# Altium PCB 高达会车驱动.PcbDoc
Units mil, origin at the board's own origin, x right, y up, seen from the top; angles counter-clockwise.
Board outline 3149.61 x 2559.06 mil, 2 copper layers (Top Layer, Bottom Layer); 70 components, 50 nets, 207 pads, 87 vias.
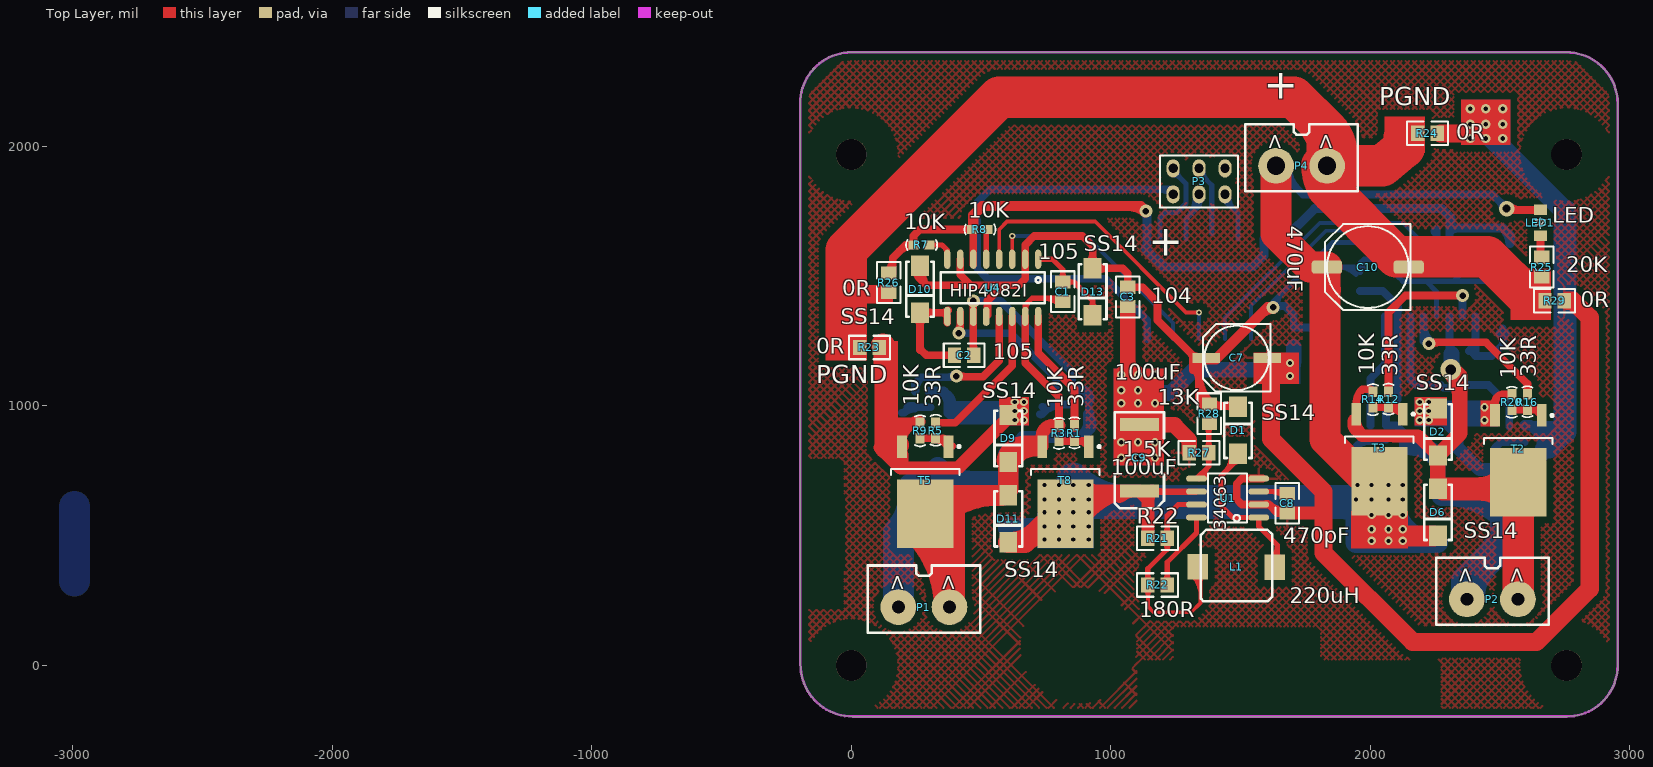
[diagram p0: Top Layer view]
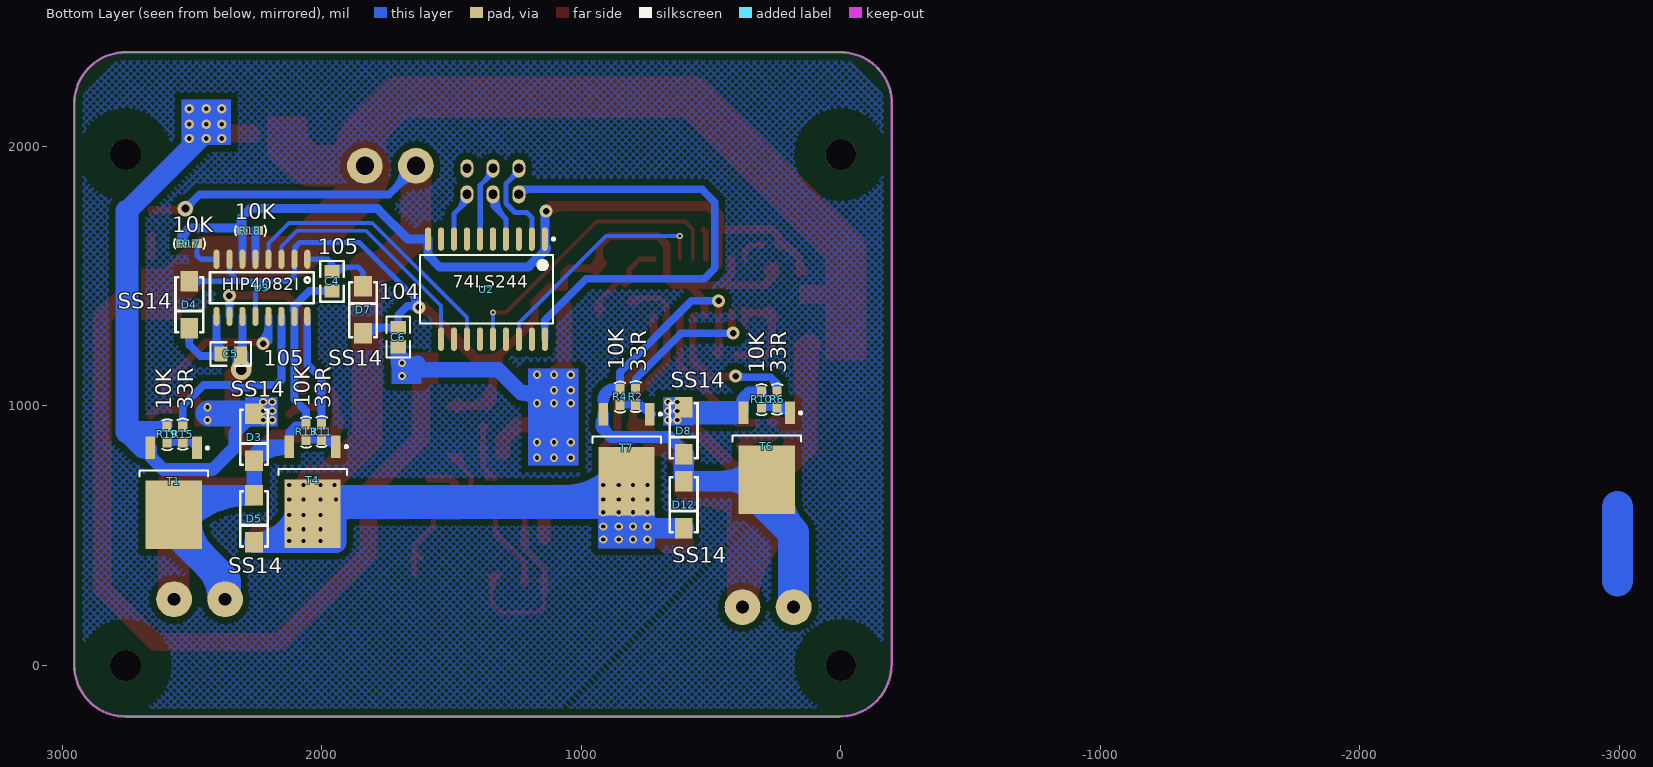
[diagram p1: Bottom Layer view, seen from below]
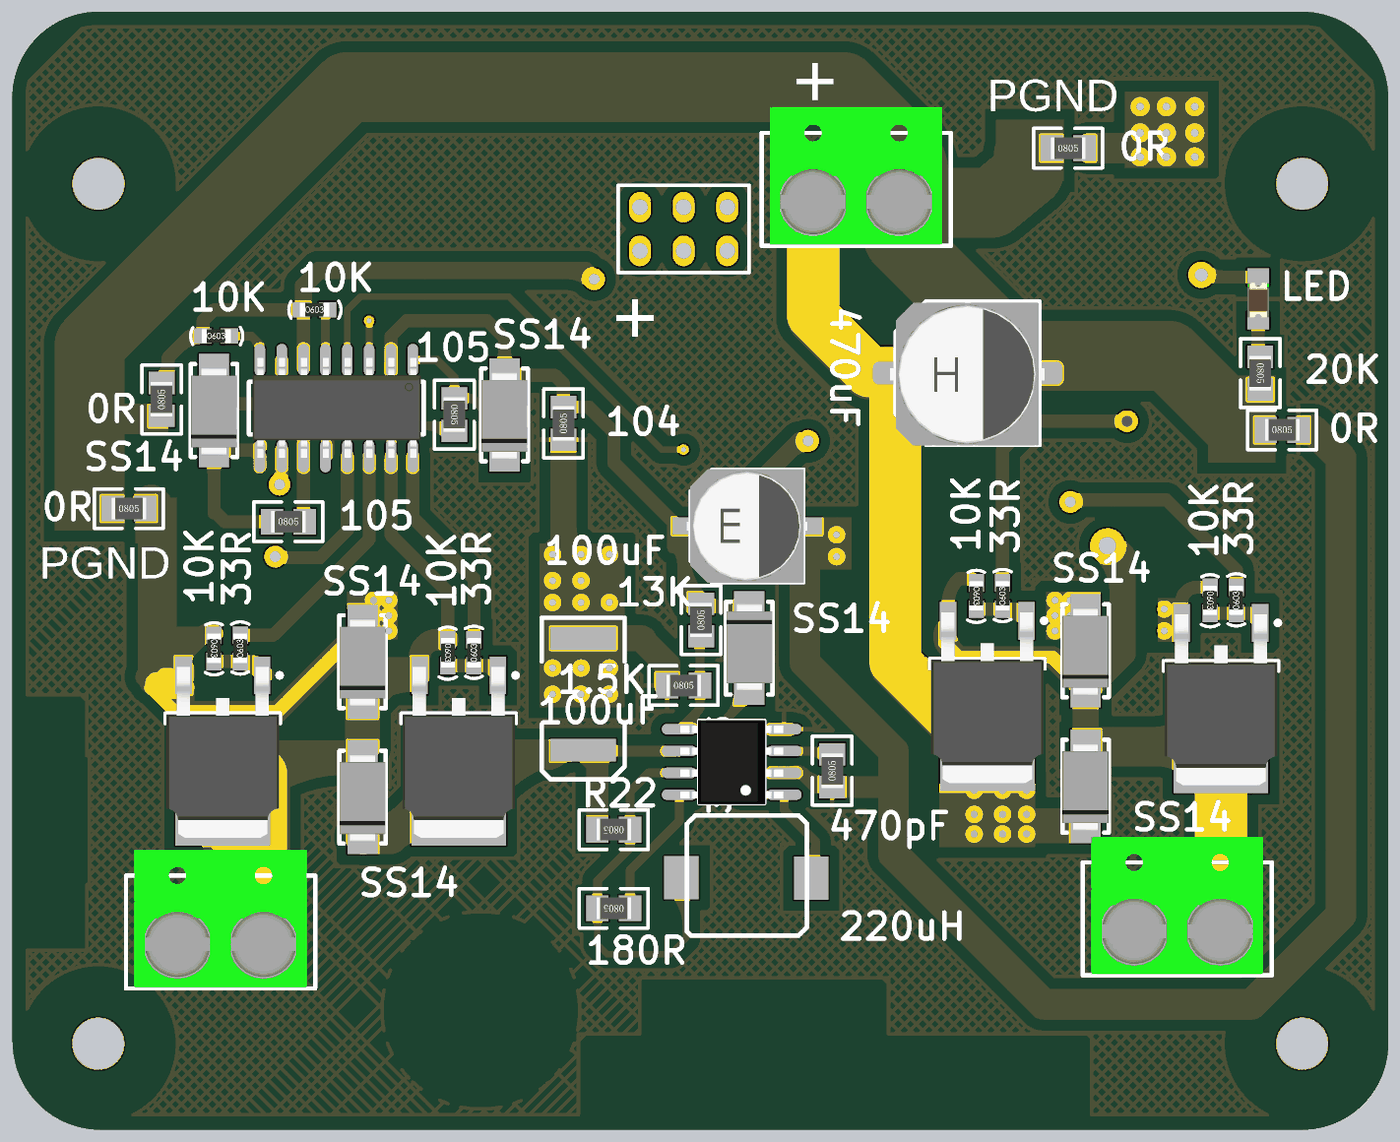
[diagram p2: 3D render of the assembled board from above, using the file's embedded part models]
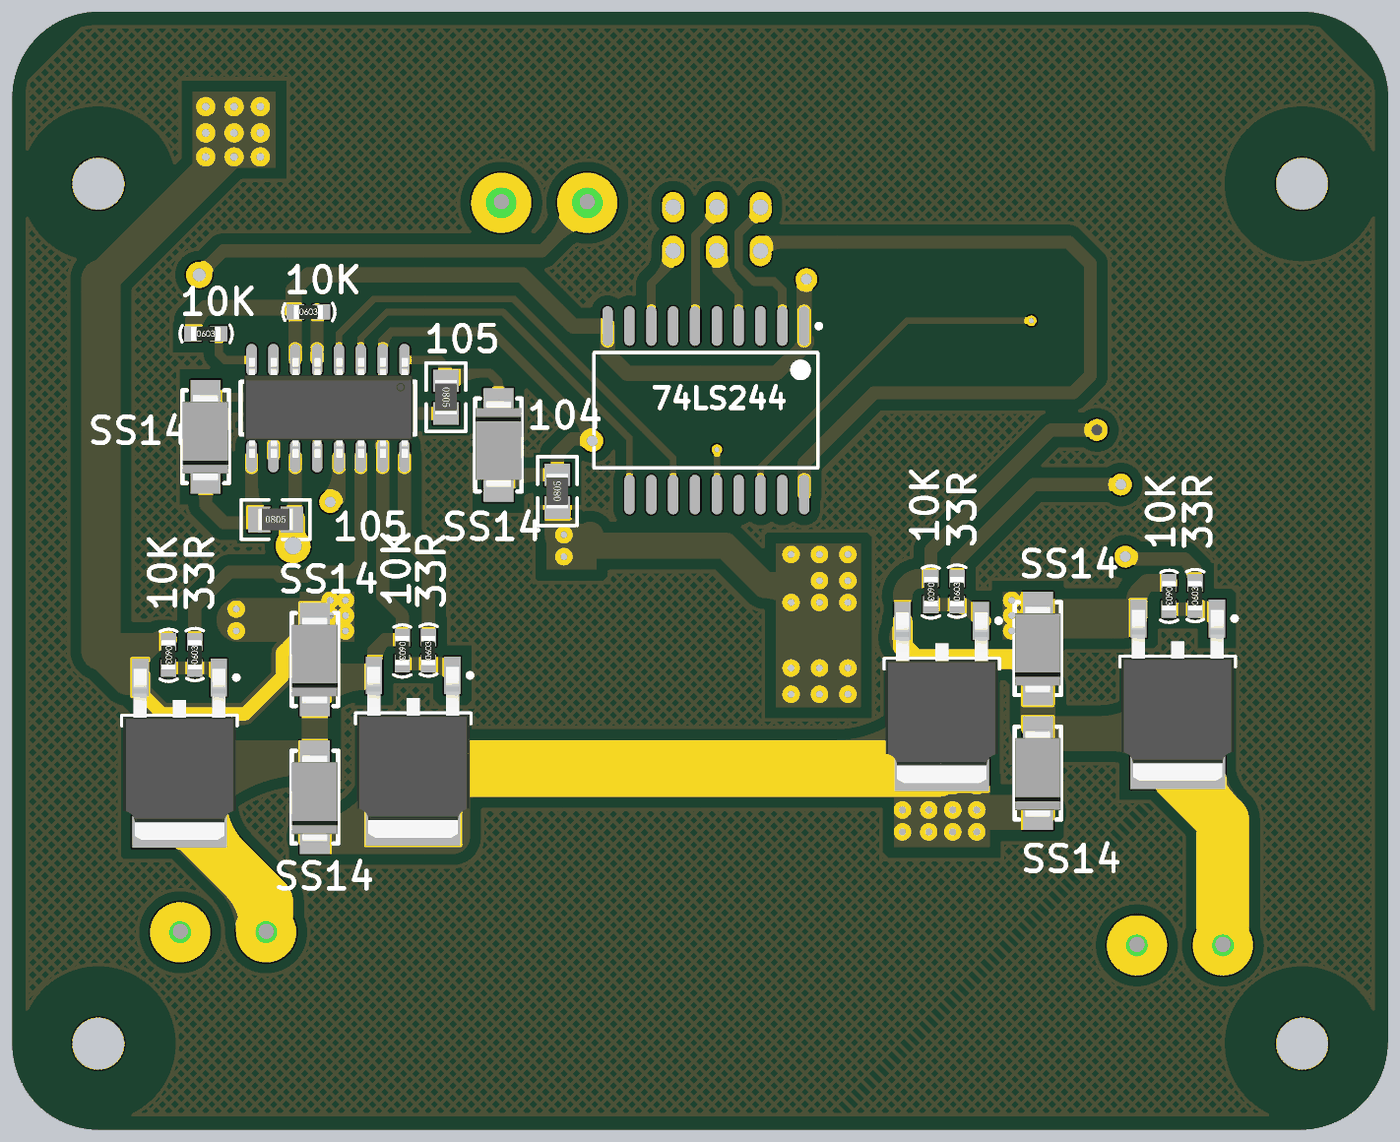
[diagram p3: 3D render of the assembled board from below, using the file's embedded part models]

## Layer stack, top to bottom
Top Solder: solder mask 0.4, Solder Resist, Dk 3.5
Top Layer: signal copper 1.4
Dielectric1: dielectric 12.6, FR-4, Dk 4.8
Bottom Layer: signal copper 1.4
Bottom Solder: solder mask 0.4, Solder Resist, Dk 3.5

## Board outline
5,-196.85 cw(c5,4.07) -195.92,4.07 -196.85,4.07 -196.85,2165.35 cw(c0,2165.35) 0,2362.2 2755.91,2362.2 cw(c2755.91,2165.35) 2952.76,2165.35 2952.76,0 cw(c2755.91,0) 2755.91,-196.85

## Design rules (kind name [scope] priority, off if disabled: settings)
Clearance hold [HasPad('free-1') or HasPad('free-2')  or HasPad('free-3') oR HasPad('free-4') vs inpolygon] p1: gap=118.11
Clearance inpolygon [inpolygon] p2: gap=25
Clearance main_road_clearance [InNetClass('POWER_OR_GND')] p3: gap=15
Clearance [All] p4: gap=10
PolygonConnect PGND2 [InNet('PGND2')] p1: connectstyle=Direct reliefconductorwidth=10 reliefentries=4 polygonreliefangle="90 Angle" airgapwidth=10
PolygonConnect PGND1 [InNet('PGND1')] p2: connectstyle=Direct reliefconductorwidth=10 reliefentries=4 polygonreliefangle="90 Angle" airgapwidth=10
PolygonConnect [All] p3: connectstyle=Relief reliefconductorwidth=10 reliefentries=4 polygonreliefangle="90 Angle" airgapwidth=10
RoutingVias [All] p1: holewidth=28 width=50 viastyle="Through Hole" minholewidth=16 minwidth=32 maxholewidth=50 maxwidth=90
SilkToSolderMaskClearance SilkscreenOverComponentPads [IsPad] p1: minsilkscreentomaskgap=10 clearancetoexposedcopper=TRUE
SolderMaskExpansion [All] p1: expansion=4
Width main_road_width [InNetClass('POWER_OR_GND')] p1: maxlimit=170 minlimit=20 preferedwidth=80
Width [All] p2: maxlimit=30 minlimit=10 preferedwidth=15
29 further rules are at their usual default settings.

## Classes and differential pairs
net class POWER_OR_GND: 5V 7.2V 12V AGND DGND GND M1 M2 M3 M4 PGND1 PGND2

## Components (designator, comment, footprint, x,y, rotation, side; value= is the part's Value field where it differs from the comment)
C1 "105" 0805 815,1440 r270 top
C2 "105" 0805 435,1195 r0 top
C3 "104" 0805 1065,1420 r90 top
C4 "105" 0805 1960,1480 r270 bottom
C5 "105" 0805 2350,1200 r180 bottom
C6 "104" 0805 1705,1265 r90 bottom
C7 "100uF" ED6.3 1485,1185 r0 top
C8 "470pF" 0805 1680,625 r90 top
C9 "100uF" "Pol Cap(220uF)" 1110,800 r90 top
C10 "470uF" ED8 1990,1535 r0 top
D1 "SS14" 二极管 1490,910 r90 top
D2 "SS14" 二极管 2260,895 r270 top
D3 "SS14" 二极管 2260,875 r270 bottom
D4 "SS14" 二极管 2510,1385 r270 bottom
D5 "SS14" 二极管 2260,560 r270 bottom
D6 "SS14" 二极管 2260,585 r270 top
D7 "SS14" 二极管 1840,1375 r90 bottom
D8 "SS14" 二极管 605,900 r270 bottom
D9 "SS14" 二极管 605,870 r270 top
D10 "SS14" 二极管 265,1445 r270 top
D11 "SS14" 二极管 605,560 r270 top
D12 "SS14" 二极管 605,615 r270 bottom
D13 "SS14" 二极管 930,1435 r270 top
L1 "220uH" 电感（220uh） 1485,385 r0 top
LED1 "LED" LED(0805) 2655,1705 r270 top
P1 "*" 接线端子#1 280,225 r180 top
P2 "*" 接线端子#1 2470,255 r180 top
P3 "Header 3X2" HDR2X3 1240,1815 r0 top
P4 "*" 接线端子#2 1735,1925 r180 top
R1 "33R" 0603 860,895 r90 top
R2 "33R" 0603 790,1035 r90 bottom
R3 "10K" 0603 800,895 r270 top
R4 "10K" 0603 850,1035 r270 bottom
R5 "33R" 0603 325,905 r90 top
R6 "33R" 0603 245,1025 r90 bottom
R7 "10K" 0603 270,1620 r0 top
R8 "10K" 0603 495,1680 r0 top
R9 "10K" 0603 265,905 r270 top
R10 "10K" 0603 305,1025 r270 bottom
R11 "33R" 0603 2000,900 r90 bottom
R12 "33R" 0603 2070,1025 r90 top
R13 "10K" 0603 2060,900 r270 bottom
R14 "10K" 0603 2010,1025 r270 top
R15 "33R" 0603 2535,890 r90 bottom
R16 "33R" 0603 2605,1015 r90 top
R17 "10K" 0603 2510,1625 r180 bottom
R18 "10K" 0603 2275,1675 r180 bottom
R19 "10K" 0603 2595,890 r270 bottom
R20 "10K" 0603 2545,1015 r270 top
R21 "R22" 0805 1180,490 r180 top
R22 "180R" 0805 1180,310 r180 top
R23 "0R" 0805 70,1225 r0 top
R24 "0R" 0805 2220,2050 r0 top
R25 "20K" 0805 2660,1535 r270 top
R26 "0R" 0805 145,1475 r90 top
R27 "1.5K" 0805 1340,820 r0 top
R28 "13K" 0805 1380,970 r90 top
R29 "0R" 0805 2710,1405 r0 top
T1 "IRLR7843" IRLR7843(MOS) 2550,620 r270 bottom
T2 "IRLR7843" IRLR7843(MOS) 2590,745 r270 top
T3 "IRLR7843" IRLR7843(MOS) 2055,750 r270 top
T4 "IRLR7843" IRLR7843(MOS) 2015,625 r270 bottom
T5 "IRLR7843" IRLR7843(MOS) 305,625 r270 top
T6 "IRLR7843" IRLR7843(MOS) 265,755 r270 bottom
T7 "IRLR7843" IRLR7843(MOS) 805,750 r270 bottom
T8 "IRLR7843" IRLR7843(MOS) 845,625 r270 top
U1 "34063" MA34063 1445,640 r180 top
U2 "74LS244" 74LS244D 1365,1450 r270 bottom
U3 "HIP4082I" HIP4082I 2215,1455 r270 bottom
U4 "HIP4082I" HIP4082I 560,1455 r270 top

## Footprints (in the part's own frame and the unit in brackets; to place one, negate y for a bottom-side part, rotate by r counter-clockwise, add the part's x,y. Pads: shape width x height; smd on the part's side, far side on the other; paste and mask are expansions set on the pad)
74LS244D [mm]
  oval 2.3x0.6 smd: 1(-4.9,5.715) 2(-4.9,4.445) 3(-4.9,3.175) 4(-4.9,1.905) 5(-4.9,0.635) 6(-4.9,-0.635) 7(-4.9,-1.905) 8(-4.9,-3.175) 9(-4.9,-4.445) 10(-4.9,-5.715) 12(4.9,-4.445) 13(4.9,-3.175) 14(4.9,-1.905) 15(4.9,-0.635) 16(4.9,0.635) 17(4.9,1.905) 18(4.9,3.175) 19(4.9,4.445) 20(4.9,5.715)
  silkscreen extent -5.02,-6.5 3.35,6.69, body extent -3.8,-6.5 3.8,6.5, height 2.65
0603 [mil]
  rect 40x35 smd: 1(-30,0) 2(30,0)
  silkscreen extent -59,-20 61,20, body extent -33,-16 33,16, height 22
0805 [mm]
  rect 1.3x1.5 smd: 1(-0.95,0) 2(0.95,0)
  silkscreen extent -2,-1.15 2,1.15, body extent -1,-0.63 1,0.63, height 0.55
ED6.3 [mm]
  rect 2.7x1 smd: 1(-3,0) 2(3,0)
  silkscreen extent -3.3,-3.3 3.3,3.3, body extent -3.5,-3.3 3.5,3.3, height 5.2
ED8 [mm]
  rrect50% 3x1.3 smd: 1(-4,0) 2(4,0)
  silkscreen extent -4.2,-4.2 4.2,4.2, body extent -4.52,-4.22 4.48,4.08, height 10.5
HDR2X3 [mil] "Connector; Head"
  oval 50x70 hole 36: 1(0,0) 2(0,100) 3(100,0) 4(100,100) 5(200,0) 6(200,100)
  silkscreen extent -50,-50 250,150
HIP4082I [mil]
  oval 74x24 smd: 1(-110,160) 2(-110,110) 3(-110,60) 4(-110,10) 5(-110,-40) 6(-110,-90) 7(-110,-140) 8(-110,-190) 9(110,-190) 10(110,-140) 11(110,-90) 12(110,-40) 13(110,10) 14(110,60) 15(110,110) 16(110,160)
  silkscreen extent -60,-215 60,185, body extent -115,-207 113,179, height 69
IRLR7843(MOS) [mm]
  rect 2.2x0.95 smd: 1(-5.543,1.772) 3(-5.543,-2.788)
  rect 6.7x5.5 smd: 2(1.007,-0.508)
  silkscreen extent -5.67,-3.86 -2.74,2.92, body extent -6.04,-3.78 3.9,2.76, height 2.39
LED(0805) [mil]
  rect 40x50 smd: 1(-50,0) 2(50,0)
  silkscreen extent -20,-20 20,20, body extent -37,-24 43,25, height 43
MA34063 [mil]
  oval 80x24 smd: 1(-125,70) 2(-125,20) 3(-125,-30) 4(-125,-80) 5(115,-80) 6(115,-30) 7(115,20) 8(115,70)
  silkscreen extent -80,-100 70,90, body extent -123,-101 113,92, height 61
"Pol Cap(220uF)" [mm]
  rect 1.3x3.8 smd: 1(-3.25,0) 2(3.25,0)
  silkscreen extent -4.95,-2.41 4.44,2.41
二极管 [mm]
  rect 2x1.75 smd: 1(-2.413,0) 2(2.187,0)
  silkscreen extent -2.81,-1.35 2.59,1.35, body extent -2.61,-1.34 2.49,1.33, height 2.12
接线端子#1 [mm]
  round 3.5 hole 1.27: 1(-2.5,0) 2(2.5,0)
  silkscreen extent -5.5,-4.06 5.5,2.5, body extent -4.99,-5.56 5.01,2.44, height 11
接线端子#2 [mm]
  round 3.5 hole 1.778: 1(-2.5,0) 2(2.5,0)
  silkscreen extent -5.5,-4.06 5.5,2.5, body extent -4.99,-5.56 5.01,2.44, height 11
电感（220uh） [mm]
  rect 2x2.5 smd: 1(-3.81,-0.127) 2(3.734,-0.152)
  silkscreen extent -3.5,-3.5 3.48,3.5

## Part data
P3: "Header, 3-Pin, Dual row"

## Free pads (board coordinates)
  round 118.11 hole 118.11: 1(0.39,1968.5) 2(0,0) 3(2755.91,0) 4(2755.91,1968.5)

## Via types
v1: diameter 32, hole 16, Top Layer to Bottom Layer, 67 vias
v2: diameter 36, hole 18, Top Layer to Bottom Layer, 9 vias
v3: diameter 50, hole 25, Top Layer to Bottom Layer, 7 vias
v4: diameter 24, hole 12, Top Layer to Bottom Layer, 2 vias
v5: diameter 80, hole 40, Top Layer to Bottom Layer, 1 vias
v6: diameter 60, hole 30, Top Layer to Bottom Layer, 1 vias

## Nets (pads, with @x,y where several pads share a name; then routed paths per layer and width w, separated by ;. In a path a pad name is that pad's centre, name@x,y a point inside that pad or via, vN(x,y) a via of type N, cw(c..) or ccw(c..) an arc to the next point about the centre after c; other vN are vias at no path point)
5V: P3.1 U2.20 | length 1891.4
  Bottom Layer w30: U2.20 1140,1330 980,1490 525,1490 485,1530 485,1785 535,1835 1230,1835 P3.1@1240,1825 ; 1191.72,1835 cw(c1191.72,1776.72) P3.1@1232.93,1817.93
7.2V: C9.1 C10.1 D5.2 D6.2 D11.2 D12.2 LED1.1 P4.2 R21.2 T3.2 T4.2 T7.2 T8.2 U1.6 | length 7510.9
  Top Layer w25: C9.1@1112.05,670 U1.6 ; C9.1@1168.47,662.79 cw(c1185.87,645.39) 1185.87,670 ; C9.1@1168.47,681.3 ccw(c1195.76,708.6) 1195.76,670
  Top Layer w30: v6@2530,1755 LED1.1 ; v6@2535.61,1770.61 ccw(c2573.28,1808.28) 2573.28,1755
  Top Layer w50: T8.2@797.01,631.51 ccw(c813.47,678.22) T8.2@834.86,633.55 ; T8.2@811.4,618.73 cw(c915.24,544.28) T8.2@915.24,672.05 ; T8.2@835,641.2 cw(c854.53,620.69) T8.2@855.22,649 ; T8.2@847.1,644.31 cw(c869.14,632.29) T8.2@862.05,656.38 ; T8.2@852.04,589.59 cw(c1012.61,474.46) 1012.61,672.05 ; T8.2@892.67,560.46 cw(c1109.98,404.65) C9.1 ; T8.2@908.64,646.36 cw(c970.64,584.36) 970.64,672.05 ; T8.2@908.64,688.64 ccw(c948.68,728.68) 948.68,672.05 ; T8.2@911.69,672.05 C9.1 ; 1033.01,651.42 ccw(c1021.39,694.79) C9.1@1060.28,672.34 ; R21.2 1142.6,639.45 1112.05,670 C9.1 ; 1142.6,630.51 cw(c1200.75,630.51) C9.1@1159.63,671.63 ; 1142.6,635.46 cw(c1189.51,635.46) C9.1@1159.59,671.59
  Top Layer w80: D11.2@605,473.27 ccw(c605,626.01) 713.01,518.01 ; D11.2@615,473.9 668.9,473.9 ; T8.2@735,540 668.9,473.9 ; T8.2@798.23,498.93 ccw(c752.09,390.72) 668.9,473.9 ; 1975,498.9 D6.2@2245,498.9
  Top Layer w120: P4.2 1636.57,1663.43 1765,1535 C10.1 ; C10.1@1825,1527.48 1825,1445 ; 1827.52,1447.52 1825,1445 ; T3.2 1984.65,710.35 1825,870 1825,1445
  Top Layer w130: T8.2@807.87,585.35 T8.2
  Bottom Layer w30: P4.2@1636.57,1880 cw(c1636.57,1787.23) 1702.17,1852.83 ; P4.2@1636.57,1940 P4.2 1636.57,1918.43 1740,1815 2470,1815 v6(2525,1760) ; P4.2@1681.57,1925 ccw(c1806.08,1925) 1718.04,1836.96 ; v6@2510,1760 ccw(c2473.79,1760) 2499.39,1785.61 ccw(c2525,1811.21) v6@2525,1775
  Bottom Layer w80: D12.2 721.1,528.9 ; T4.2@1945,585.35 1945,473.9 D5.2 cw(c2259.99,645.82) T4.2@2098.95,585.63 ; T4.2@2024.01,557.62 ccw(c2144.69,602.73) 2144.69,473.9
  Bottom Layer w130: T7.2@835,630 1920,630 cw(c1920,538.28) T4.2@1998.14,586.32 ; T7.2@855.59,717.33 ccw(c1066.42,928.15) 1066.42,630 ; 1879.79,630 cw(c1879.79,453.76) T4.2@2004.41,578.38
  other v1: 2005,480 2070,480 2125,480 745,485 800,485 855,485 915,485 2005,525 2070,525 2125,525 745,535 800,535 855,535 915,535 2005,580 2070,580 2125,580 745,590 800,590 855,590 915,590 745,640 800,640 855,640 915,640 1945,640 2005,640 2070,640 2125,640 745,695 800,695 855,695 915,695 1950,695 2005,695 2070,695 2125,695
12V: C3.2 C6.2 C7.1 D1.2 D4.1 D7.1 D10.1 D13.1 R28.2 U3.2 U3.7 U3.12 U4.2 U4.7 U4.12 | length 5429.3
  Top Layer w30: D10.1@251.66,1520.93 cw(c222.49,1490) 265,1490 ; D10.1@255.84,1540.31 ccw(c290.15,1520.72) 262.21,1492.79 ; D10.1 265,1490 ; D10.1@278.34,1520.93 ccw(c307.51,1490) 265,1490 ; D10.1@281.89,1525.44 ccw(c325.53,1500.53) 290,1465 ; U4.7 420,1505 460,1465 ; U4.12@525,1350 525,1405 580,1460 ; D13.1@916.25,1548.67 ccw(c883.05,1581.87) 930,1581.87 ccw(c976.95,1581.87) D13.1@943.75,1548.67 ; D13.1@943.75,1516.25 cw(c976.95,1483.05) 976.95,1530 cw(c976.95,1576.95) D13.1@943.75,1543.75 ; 1311.04,1198.96 ccw(c1333.43,1221.34) C7.1@1333.43,1189.68 ; 1317.05,1137.12 cw(c1377.33,1137.12) C7.1@1336.59,1181.55 ; 1317.05,1140 1317.05,1192.95 1180,1330 1180,1400 1122.6,1457.4 C3.2 1065,1510 1045,1530 D13.1 930,1615 890,1655 705,1655 670,1620 U4.2 670,1490 645,1465 460,1465 ; 1325.11,1136.69 cw(c1289.17,1100.75) 1340,1100.75 ; C7.1@1330.11,1181.69 cw(c1306.24,1157.82) 1340,1157.82 ; 1340,1047.61 ccw(c1416.27,1047.61) R28.2@1362.34,993.68 ; 1340,1120.03 ccw(c1488.69,1120.03) R28.2@1383.55,1014.89 ; C7.1@1340,1179 1340,1030 ; R28.2@1374.82,1017.92 cw(c1369.87,1059.86) 1340,1030 ; R28.2@1391.43,1014.89 ccw(c1427.37,1050.84) 1427.37,1000 ; 1440.58,1000 ccw(c1440.58,1050.45) D1.2@1476.25,1014.78 ; 1445.52,1000 cw(c1445.52,956.54) D1.2@1476.25,987.27 ; D1.2@1505,1000 1387.4,1000 R28.2 1362.6,1007.4 1340,1030 ; 265,1490 290,1465 ; 290,1465 460,1465
  Top Layer w40: C7.1@1340,1179 1404,1179 1605,1380 v3(1625,1380) ; 1582.32,1357.32 cw(c1625,1314.64) v3@1625,1375
  Bottom Layer w20: v3@1620,1380 cw(c1656.21,1380) 1630.61,1405.61 ; v3(1625,1380) 1645,1380 1625,1400 1855,1630 2085,1630 2105,1610 U3.2 2105,1500 2125,1480 2215,1480 ; v3@1640,1380 cw(c1724.5,1380) 1664.75,1439.75 ; 2087.44,1627.56 cw(c2049.89,1590) U3.2@2103,1590 ; U3.12 2255,1440 2215,1480 ; U3.7 2355,1515 2320,1480 ; D4.1@2492.71,1462.71 ccw(c2450.98,1420.98) 2450.98,1480 ccw(c2450.98,1539.02) D4.1@2492.71,1497.29 ; D4.1 2320,1480 ; 2215,1480 2320,1480
  Bottom Layer w30: v3@1632.07,1372.93 cw(c1661.21,1343.79) 1661.21,1385 ; v3@1635,1385 1670,1385 1705,1350 C6.2 D7.1@1822.4,1302.4 ; 1750.85,1302.4 cw(c1750.85,1195.77) D7.1@1826.25,1271.17
AGND: C3.1 C6.1 C7.2 C8.1 C9.2 R27.1 R29.2 U1.2 U1.4 | length 6980.7
  Top Layer w30: U1.4@1585,720 U1.4 1505,720 1485,700 1485,640 1505,620 U1.2 U1.2@1609.86,620 ; U1.2@1598,623 cw(c1598,601.62) 1613.12,616.74 ; C8.1@1674.65,598.09 cw(c1664.39,674.53) U1.2@1609.86,620 ; C8.1 1642.26,587.6 U1.2@1609.86,620
  Top Layer w50: C8.1 1812.6,587.6
  Top Layer w60: v1@1049.9,1000.1 ccw(c1013.44,1036.56) 1065,1036.56 ; v1@1049.9,1019.9 cw(c1013.44,983.44) 1065,983.44 ; v1@1049.9,1050.1 ccw(c1013.44,1086.56) 1065,1086.56 ; v1@1049.9,1069.9 cw(c1013.44,1033.44) 1065,1033.44 ; v1@1049.9,1110.1 ccw(c1013.44,1146.56) 1065,1146.56 ; v1@1049.9,1129.9 cw(c1013.44,1093.44) 1065,1093.44 ; 1065,955.48 cw(c1149.16,955.48) v1@1096.19,1020.88 ; 1065,997.23 cw(c1167.77,997.23) v1@1095.1,1069.9 ; 1065,1057.23 cw(c1167.77,1057.23) v1@1095.1,1129.9 ; 1065,1072.77 ccw(c1167.77,1072.77) v1@1095.1,1000.1 ; 1065,1122.77 ccw(c1167.77,1122.77) v1@1095.1,1050.1 ; 1065,1182.77 ccw(c1167.77,1182.77) v1@1095.1,1110.1 ; C3.1 1065,972.95 ccw(c1110,972.95) C9.2 1242.05,927.95 cw(c1242.05,920) 1250,920 1302.6,867.4 R27.1 ; 1615,1090 C7.2@1615,1175
  Top Layer w70: 1617.6,1102.6 1617.6,872.4 1820,670 1820,433.43 2163.43,90 2640,90 2845,295 2845,1340 2780,1405 R29.2@2760,1405
  Bottom Layer w60: 1150,1060 1150,1050 1230,1050 ; v1@1159.78,1019.57 cw(c1230,953.78) 1230,1050 ; 1660,1126.37 cw(c1728.63,1126.37) 1680.1,1174.9 ccw(c1716.56,1138.44) 1665,1138.44 ; v1@1676,1115 cw(c1738.77,1115) v1@1694.38,1159.38 ; v1@1676.63,1169.16 ccw(c1728.14,1153.14) v1(1690,1115) 1670,1135 ; v1@1695.39,1152.08 cw(c1672.34,1207.34) 1630,1165 ; v1@1700.32,1124.46 ccw(c1665,1092.09) 1665,1140 ; v1@1700.32,1155.54 cw(c1665,1187.91) 1665,1140 ; v1@1701.63,1157.2 cw(c1660,1185.12) 1660,1135 ; v1@1703.66,1161.93 cw(c1670,1169.5) 1670,1135 ; C6.1 1705,1170 1670,1135 ; 1230,1050 1320,1140 1630,1140 ; 1630,1140 1630,1165 ; 1630,1140 1655,1140 ; 1630,1165 1655,1140 ; 1655,1140 1665,1140 ; 1655,1140 1660,1135 ; 1660,1135 1670,1135 ; 1663.44,1140 ccw(c1663.44,1191.56) v1@1699.9,1155.1 ; 1663.44,1140 ccw(c1663.44,1191.56) v1@1699.9,1155.1 ; 1663.44,1140 ccw(c1663.44,1191.56) v1@1699.9,1155.1 ; 1663.44,1140 cw(c1663.44,1088.44) v1@1699.9,1124.9 ; 1663.44,1140 cw(c1663.44,1088.44) v1@1699.9,1124.9 ; 1663.44,1140 cw(c1663.44,1088.44) v1@1699.9,1124.9 ; 1665,1140 1670,1135 ; v1@1699.9,1124.9 ccw(c1675.51,1100.51) 1675.51,1135 cw(c1675.51,1100.51) v1@1699.9,1124.9 ; 1150,1024.49 ccw(c1184.49,1024.49) 1160.1,1000.1 cw(c1184.49,1024.49) 1150,1024.49
  other v1: 1040,800 1105,800 1170,800 1040,860 1105,860 1170,860 1040,1010 1105,1010 1170,1010 1040,1060 1105,1060 1040,1120 1105,1120 1170,1120 1690,1165
CH1: P3.2 U2.2 | length 427.7
  Bottom Layer w20: U2.2 1190,1725 1210,1745 1255.36,1745 1290,1779.64 1290,1855.71 1240,1905.71 P3.2@1240,1925 ; P3.2@1240,1890 cw(c1240,1852.07) 1266.82,1878.89 ; P3.2@1255,1905 ccw(c1289.5,1905) 1265.1,1880.61
CH2: P3.3 U2.4 | length 407.8
  Bottom Layer w20: U2.4 1290,1720 ; 1323.96,1753.96 ccw(c1273.18,1804.75) P3.3@1345,1805.02 ; P3.3@1325,1804.94 cw(c1205.51,1804.5) 1290,1720 ; P3.3@1329.66,1794.14 cw(c1306.67,1770) 1340,1770 ; P3.3@1340,1825 1340,1770 ; P3.3@1350.34,1794.14 ccw(c1373.33,1770) 1340,1770 ; 1290,1720 1340,1770
CH3: P3.4 U2.6 | length 337.8
  Bottom Layer w20: P3.4@1340,1890 cw(c1340,1869.14) 1354.75,1883.89 ; P3.4@1340,1925 1340,1898.64 1388.64,1850 U2.6@1388.64,1664.27 ; P3.4@1355,1905 ccw(c1406.57,1905) 1370.1,1868.54
CH4: P3.5 U2.8 | length 259.7
  Bottom Layer w20: P3.5@1440,1825 1440,1790 1490,1740 U2.8 ; P3.5@1455,1805 ccw(c1527.43,1805) 1476.21,1753.79
DGND: R7.1 R8.1 R17.1 R18.1 R26.2 U2.1 U2.10 U3.6 U4.6 | length 3566.6
  Top Layer w30: R26.2@141.45,1519.89 ccw(c96.66,1564.68) 160,1564.68 ; R26.2@160,1512.4 160,1570 210,1620 R7.1 240,1655 265,1680 R8.1 470,1680 U4.6 U4.6@470,1545 ; 186.29,1596.29 cw(c237.5,1545.07) R7.1@237.5,1617.5
  Top Layer w40: R8.1@470,1680 470,1735 505,1770 1115,1770 v3(1135,1750) ; 1074.64,1770 cw(c1074.64,1689.64) v3@1131.46,1746.46
  Bottom Layer w30: U3.6 R18.1 2305,1720
  Bottom Layer w35: v3@1129.7,1744.7 cw(c1104.82,1719.82) 1140,1719.82 ; v3(1135,1750) 1140,1745 U2.1 1140,1600 1145.69,1594.31 1145.69,1591.09 1171.65,1565.14 ; 1174.86,1565.14 1185,1555 ; 1181.78,1555 1185,1555 ; R18.1@2307.5,1675 cw(c2331.64,1650.86) 2331.64,1685 ; 2514.52,1680.48 cw(c2459.04,1625) R17.1@2537.5,1625 ; 2540,1645 2540,1655 2510,1685 2310,1685 2310,1725 2275,1760 1785,1760 1667.91,1642.91 U2.10 1590,1580 1545,1535 1205,1535 1185,1555 ; U2.1@1134.31,1609.45 ccw(c1151.15,1609.45) 1139.24,1597.54 cw(c1151.15,1609.45) U2.1@1134.31,1609.45
GND: C10.2 P4.1 R23.1 R24.1 R25.2 R26.1 R29.1 | length 4537.3
  Top Layer w160: -20,1260 -20,1600 570,2190 1705,2190 1833.43,2061.57 ; 1771,2124 cw(c1571.99,1925) P4.1@1853.43,1925 ; P4.1@1813.43,1925 ccw(c1966.55,1925) 1858.27,1816.73 ; 1828.43,1855 P4.1@1828.43,1946.57 ; 1833.43,1841.57 2100,1575 2450,1575 2615,1410 2615,1420 ; P4.1 2045,1925 2130,1995 2130,2035 ; P4.1@1833.43,1940 1833.43,2061.57 ; P4.1@1850.42,1914.45 ccw(c1749.16,1977.3) 1833.43,2061.57
M1: C1.2 D9.2 D11.1 P1.1 R3.1 T5.2 T8.3 U4.15 | length 2572.8
  Top Layer w20: U4.15 670,1389 696,1415 802.6,1415 C1.2 ; U4.15@672,1370 cw(c722.7,1370) 686.85,1405.85 ; 743.48,1415 cw(c743.48,1335.02) C1.2@800.04,1391.57
  Top Layer w30: U4.15 670,1165 800,1035 R3.1
  Top Layer w50: T8.3 735.24,883.05 cw(c777.18,883.05) 777.18,925 R3.1
  Top Layer w80: T5.2@333.27,560.7 cw(c560.92,333.05) 560.92,655 ; T5.2@354.65,655 D11.1@580,655 ; D9.2@599.55,789.85 cw(c666.1,777.27) 666.1,845 ; D9.2@600.78,792.43 cw(c715,694.65) 715,845 666.1,845 ; D11.1@605,680 D9.2 666.1,845
  Top Layer w120: T5.2@250.87,527.6 cw(c-57.08,219.65) P1.1@378.43,219.65 ; P1.1 T5.2@378.43,605
M2: C2.2 D8.2 D12.1 P1.2 R4.1 T6.2 T7.3 U4.11 | length 2827.4
  Top Layer w30: C2.2@470,1192.6 U4.11 v3(470,1405) ; 470,1230.3 ccw(c503.77,1230.3) C2.2@479.89,1206.43
  Bottom Layer w30: v3(470,1405) 575,1405 850,1130 R4.1 R4.1@850,1060 ; D8.2 D8.2@605,825 ; T7.3 914.76,1023.12
  Bottom Layer w45: D8.2@605,825 660,880 885,880 914.76,909.76 ; D8.2@616.95,818.82 cw(c660.72,818.82) D8.2@629.77,849.77 ; 872.89,1065 cw(c872.89,1023.12) 914.76,1023.12 ; 897.31,892.31 ccw(c846,943.62) T7.3@918.56,943.62 ; T7.3 914.76,909.76 ; T7.3@917.87,945.81 cw(c894.9,929.63) 914.76,909.76
  Bottom Layer w80: T6.2@290.35,710 D12.1@585,710 ; T6.2@333.27,667.08 cw(c436.89,563.47) 436.89,710 ; T6.2@333.27,763.63 ccw(c462.74,893.09) 462.74,710 ; D12.1@605,730 D8.2
  Bottom Layer w120: P1.2 181.57,511.57 285,615 T6.2 ; 181.58,511.58 ccw(c40.81,652.35) T6.2@237.35,684.05
M3: C4.2 D3.2 D5.1 P2.2 R13.1 T1.2 T4.3 U3.15 | length 2655.1
  Bottom Layer w30: C4.2 2047.4,1442.6 2105,1385 U3.15 2105,1025 2060,980 R13.1 2060,925 2100,925 ; 2099.51,1390.49 cw(c2079.03,1370) U3.15@2108,1370 ; T4.3@2121.07,868.11 ccw(c2048.63,873.62) 2100,925 ; T4.3@2124.76,825 T4.3 2124.76,900.24 2100,925
  Bottom Layer w60: D3.2@2255.55,793.78 ccw(c2208.9,793.35) 2208.9,840 ; D3.2@2256.72,790.82 ccw(c2145.01,688.54) 2145.01,840 2208.9,840 ; D5.1@2260,670 D3.2 2208.9,840 ; T1.2@2495.35,655 T1.2
  Bottom Layer w80: D5.1@2275,655 T1.2@2495.35,655 ; D5.1@2282,655 cw(c2282,315.98) T1.2@2521.73,555.7
  Bottom Layer w120: P2.2@2370,256.57 2370,325 2570,525 T1.2 T1.2@2570,565 ; P2.2@2380.47,255 cw(c2574.75,255) 2437.37,392.37 ; 2465.16,420.16 ccw(c2328.6,556.73) T1.2@2521.73,556.73
M4: C5.2 D2.2 D6.1 P2.1 R14.1 T2.2 T3.3 U3.11 | length 2755.2
  Top Layer w30: T3.3 1945.24,1006.07 cw(c2027.71,1006.07) 1969.39,1064.39 2000.61,1064.39 R14.1 ; 1987.32,1064.39 cw(c1987.32,1034.82) R14.1@2008.23,1055.73
  Top Layer w50: T3.3@1938.94,943.62 ccw(c2005.47,943.62) 1958.42,896.58 ; T3.3@1939.66,946.56 ccw(c1967.41,931.94) 1945.24,909.76 1970,885 2089.42,885 2089.49,884.92 2183.98,884.92 D2.2
  Top Layer w60: D6.1@2260,700 D2.2 2345,893.9 2345,1115 v5@2335,1125 ; v5@2302.93,1132.93 cw(c2201.36,1031.36) 2345,1031.36 ; v5@2310,1130 cw(c2310,1081.72) 2344.14,1115.86
  Top Layer w90: D6.1@2280,680 T2.2@2544.65,680 ; 2413.08,680 ccw(c2413.08,838.66) T2.2@2525.26,726.47 ; 2421.44,680 cw(c2421.44,533.17) T2.2@2525.26,636.99
  Top Layer w120: T2.2@2535.87,647.6 cw(c2453.47,565.2) 2570,565.2 cw(c2686.53,565.2) T2.2@2604.13,647.6 ; P2.1@2570,265 T2.2
  Bottom Layer w30: v5@2292.32,1157.68 ccw(c2261.72,1188.28) C5.2@2305,1188.28 ; v5@2294.03,1159.24 ccw(c2274.64,1182.6) C5.2@2305,1182.6 ; C5.2@2305,1212.43 ccw(c2382.43,1212.43) v5@2327.68,1157.68 ; 2305,1247.85 ccw(c2356.51,1247.85) C5.2@2320.09,1211.43 ; U3.11 C5.2@2305,1182.6 ; v5@2318.42,1163.54 cw(c2325.24,1182.6) C5.2@2305,1182.6
  Bottom Layer w60: v5@2312.6,1156.05 C5.2
  other v5: 2310,1140
NetC1_1: C1.1 D13.2 U4.1 | length 552.2
  Top Layer w20: U4.1 775,1565 815,1525 C1.1 857.6,1477.4 930,1405 ; C1.1@803.98,1488.43 ccw(c777.36,1515.04) 815,1515.04 ccw(c852.64,1515.04) C1.1@826.02,1488.43 ; C1.1@829.96,1466.38 cw(c856.58,1439.76) 856.58,1477.4 cw(c856.58,1515.04) C1.1@829.96,1488.43 ; D13.2@914.64,1372.84 ccw(c888.66,1405) 930,1405 ; D13.2 930,1405 ; D13.2@945.36,1372.84 cw(c971.34,1405) 930,1405
NetC2_1: C2.1 D10.2 U4.9 | length 612.2
  Top Layer w30: D10.2@251.25,1340.22 cw(c218.05,1307.02) 265,1307.02 cw(c311.95,1307.02) D10.2@278.75,1340.22 ; D10.2@278.75,1345.15 cw(c311.95,1311.94) 311.95,1358.9 cw(c311.95,1405.85) D10.2@278.75,1372.65 ; 350.44,1358.9 ccw(c350.44,1389.56) U4.9@372.12,1367.88 ; U4.9@370,1320 U4.9 356.1,1358.9 ; U4.9@372.61,1368.52 cw(c356.1,1377.87) 356.1,1358.9 ; C2.1 290,1195 270,1215 265,1215 D10.2 356.1,1358.9
NetC4_1: C4.1 D7.2 U3.1 | length 635.2
  Bottom Layer w20: D7.2@1825.31,1485.56 ccw(c1803.17,1515) 1840,1515 ; D7.2 1840,1515 ; D7.2@1854.69,1485.56 cw(c1876.83,1515) 1840,1515 ; 1875.94,1535 cw(c1875.94,1437.28) C4.1@1945.04,1506.38 ; 1924.22,1535 cw(c1924.22,1485.56) C4.1@1959.18,1520.52 ; C4.1@1950.21,1529.54 ccw(c1933.72,1550) 1960,1550 ; C4.1@1960.82,1514.29 cw(c1979.13,1532.55) 1960.84,1550.84 ; C4.1@1969.79,1529.54 cw(c1986.28,1550) 1960,1550 ; C4.1@1974.98,1528.41 cw(c1993.3,1546.69) 1975,1565 ; U3.1 1975,1565 ; 1840,1515 1860,1535 1942.4,1535 C4.1 1960,1550 ; 1960,1550 1975,1565
NetC5_1: C5.1 D4.2 U3.9 | length 509.3
  Bottom Layer w30: C5.1@2379.91,1211.43 ccw(c2319.35,1271.99) 2405,1271.99 ; C5.1@2394.89,1203.55 ccw(c2421.33,1229.99) 2421.33,1192.6 ; U3.9 2405,1192.6 2467.6,1192.6 2510,1235 D4.2 ; D4.2@2496.25,1280.22 cw(c2463.05,1247.02) 2510,1247.02 cw(c2556.95,1247.02) D4.2@2523.75,1280.22
NetC8_2: C8.2 U1.3 | length 175.3
  Top Layer w20: U1.3 1660,670 C8.2@1685,645 ; 1620.08,670 cw(c1620.08,606.42) C8.2@1665.04,651.38
NetD1_1: D1.1 L1.2 U1.1 | length 867
  Top Layer w20: 1437.6,742.6 ccw(c1370.12,810.08) D1.1@1465.55,810.08 ; D1.1@1471.74,776.74 ccw(c1438.41,810.08) D1.1@1485.55,810.08 ; D1.1@1474,779 cw(c1490,763.01) D1.1@1490,785.63 ; D1.1@1510,815 1425,730 1425,615 1470,570 U1.1 1570,535 1642,463 ; L1.2@1615.55,413.17 ccw(c1581.85,463) 1642,463 ; L1.2@1642,349 1642,463 ; 1642,435.61 ccw(c1678.76,435.61) L1.2@1652.77,409.61
NetL1_1: L1.1 R21.1 R22.2 U1.7 | length 1273
  Top Layer w15: R22.2@1129.81,293.27 cw(c1098.92,262.39) 1142.6,262.39 cw(c1186.27,262.39) R22.2@1155.39,293.27 ; R22.2 1142.6,227.4 1165,205 1310,205 1345,240 L1.1@1345,350 ; L1.1@1312.46,347.62 cw(c1233.92,269.07) 1345,269.07 ; L1.1@1323.07,358.23 cw(c1270.13,305.29) 1345,305.29 ; 1345,317.36 cw(c1387.8,317.36) L1.1@1357.54,347.62
  Top Layer w20: R22.2@1131.57,324.96 ccw(c1104.96,351.58) 1142.6,351.58 ccw(c1180.24,351.58) R22.2@1153.62,324.96 ; R22.2 1142.6,372.6 1217.4,447.4 R21.1 1217.4,577.4 1260,620 U1.7 ; R21.1@1206.38,475.04 cw(c1179.76,448.42) 1217.4,448.42 cw(c1255.04,448.42) R21.1@1228.43,475.04 ; R21.1@1206.38,504.96 ccw(c1179.76,531.58) 1217.4,531.58 ccw(c1255.04,531.58) R21.1@1228.43,504.96
NetLED1_2: LED1.2 R25.1 | length 100.5
  Top Layer w30: R25.1@2655,1577.4 LED1.2 ; 2655,1600.54 ccw(c2684.2,1600.54) R25.1@2663.55,1579.89
NetR1_1: R1.1 R3.2 T8.1 | length 123.8
  Top Layer w30: R3.2 R1.1 892.99,865 T8.1
NetR1_2: R1.2 U4.16 | length 488
  Top Layer w30: U4.16 720,1205 860,1065 R1.2@860,915
NetR2_1: R2.1 R4.2 T7.1 | length 255.2
  Bottom Layer w30: T7.1@727.22,967.79 ccw(c730.23,977.2) T7.1@737.22,970.21 ; T7.1 772.01,1005 ; T7.1@736.36,996.36 ccw(c747.1,1029.91) 772.01,1005 ; T7.1@737.52,995.75 ccw(c754.26,1017.08) 767.82,993.6 ; T7.1@750.75,983.74 cw(c790,944.49) R2.1@790,1000 ; R4.2 R2.1 772.01,1005
NetR2_2: R2.2 U4.10 | length 599.9
  Top Layer w30: v3@407.93,1287.07 ccw(c378.79,1316.21) U4.10@420,1316.21 ; v3@420,1280 U4.10 U4.10@420,1360
  Bottom Layer w30: v3(415,1280) 615,1280 790,1105 R2.2
NetR5_1: R5.1 R9.2 T5.1 | length 270.1
  Top Layer w30: R9.2 R5.1 342.99,875 ; R5.1@325,870 cw(c325,814.49) T5.1@364.25,853.74 ; T5.1@370.67,847.32 ccw(c380.76,857.41) T5.1@387.89,845.04 ; T5.1@372.92,871.04 cw(c360.54,892.54) 342.99,875 ; T5.1 342.99,875 ; 348.53,875 cw(c348.53,841.6) 372.15,865.22 ccw(c348.53,841.6) 348.53,875
NetR5_2: R5.2 U4.14 | length 576.1
  Top Layer w30: R5.2 400,935 620,1155 U4.14
NetR6_1: R6.1 R10.2 T6.1 | length 232.9
  Bottom Layer w30: T6.1 T6.1@203.23,973.23 ; R6.1@243.32,995.65 ccw(c230.5,981.5) 217.01,995 ; R6.1@243.33,990.64 ccw(c232,978) 220,990 ; R6.1@244.95,990 ccw(c243.75,932.71) T6.1@203.23,973.23 ; R10.2 R6.1 220,995 ; T6.1@203.23,973.23 220,990 ; 217.01,995 220,997.99 220,995 ; 217.01,995 220,995 ; 220,990 220,995
NetR6_2: R6.2 U4.13 | length 648.7
  Top Layer w30: v3@407.5,1112.5 507.5,1112.5 570,1175 U4.13 ; v3@412.07,1122.07 ccw(c435.18,1145.18) 435.18,1112.5
  Bottom Layer w30: R6.2 245,1085 270,1110 380,1110 ; R6.2@247.5,1057.5 cw(c319.93,1057.5) 268.71,1108.71 ; 368.79,1110 ccw(c368.79,1151.21) v3@397.93,1122.07
  other v3: 405,1115
NetR7_2: R7.2 U4.8 | length 164.5
  Top Layer w20: R7.2 350,1620 370,1600 U4.8 ; R7.2@307.8,1614.7 cw(c320.61,1601.89) 320.61,1620 cw(c320.61,1638.11) R7.2@307.8,1625.3 ; 359.51,1610.49 cw(c339.03,1590) U4.8@368,1590
NetR8_2: R8.2 U4.5 | length 140.1
  Top Layer w20: U4.5 520,1670 R8.2@530,1680 ; 520,1655.86 cw(c546.64,1655.86) R8.2@527.8,1674.7
NetR11_1: R11.1 R13.2 T4.1 | length 186.4
  Bottom Layer w30: R11.1@1999.93,865 ccw(c1997.87,790.6) T4.1 1972.01,870 R11.1 R13.2
NetR11_2: R11.2 U3.16 | length 442.8
  Bottom Layer w30: R11.2@2000,925 2000,1105 2055,1160 U3.16
NetR12_1: R12.1 R14.2 T3.1 | length 186.4
  Top Layer w30: R14.2 R12.1 2097.99,995 T3.1 ccw(c2072.13,915.6) R12.1@2070.07,990
NetR12_2: R12.2 U3.10 | length 696.9
  Top Layer w30: R12.2 2070,1360 2135,1425 v3(2355,1425)
  Bottom Layer w30: U3.10 v3(2355,1425)
NetR15_1: R15.1 R19.2 T1.1 | length 123.8
  Bottom Layer w30: T1.1 2502.01,860 R15.1 R19.2
NetR15_2: R15.2 U3.14 | length 754.7
  Bottom Layer w30: U3.14 2155,1100 2175,1080 2271.01,1080 2281.01,1070 2338.99,1070 2348.99,1080 2455,1080 2535,1000 R15.2
NetR16_1: R16.1 R20.2 T2.1 | length 123.8
  Top Layer w30: R20.2 R16.1 2637.99,985 T2.1
NetR16_2: R16.2 U3.13 | length 735.7
  Top Layer w30: v3(2225,1240) 2225,1230 2240,1245 2445,1245 2605,1085 R16.2@2605,1050 ; v3@2232.07,1232.93 cw(c2261.21,1203.79) 2261.21,1245
  Bottom Layer w30: U3.13@2205,1312.43 ccw(c2297.43,1312.43) v3@2232.07,1247.07 ; U3.13 2205,1250 2225,1230 v3(2225,1240)
NetR17_2: R17.2 U3.8 | length 154.7
  Bottom Layer w20: U3.8 2465,1565 2480,1580 R17.2 ; R17.2@2474.7,1619.7 cw(c2461.89,1606.89) 2480,1606.89 cw(c2498.11,1606.89) R17.2@2485.3,1619.7
NetR18_2: R18.2 U3.5 | length 139.9
  Bottom Layer w30: R18.2@2245.73,1673.23 cw(c2223.36,1650.86) 2255,1650.86 ; U3.5 R18.2@2255,1680
NetR22_1: R22.1 U1.8 | length 365.8
  Top Layer w20: R22.1@1206.38,324.96 ccw(c1179.76,351.58) 1217.4,351.58 ccw(c1255.04,351.58) R22.1@1228.43,324.96 ; R22.1 1217.4,397.4 1330,510 U1.8
NetR27_2: R27.2 R28.1 U1.5 | length 478.9
  Top Layer w20: U1.5 1377.4,767.4 ; U1.5@1340.06,718.57 cw(c1363.11,720.41) 1346.76,736.76 ; U1.5@1359.99,720.16 cw(c1419.88,724.92) 1377.4,767.4 ; R28.1@1365.04,921.57 cw(c1335.19,891.73) 1377.4,891.73 ; R27.2@1366.38,805.04 cw(c1339.76,778.42) 1377.4,778.42 cw(c1415.04,778.42) R27.2@1388.43,805.04 ; R27.2@1366.38,834.96 ccw(c1339.76,861.58) 1377.4,861.58 ccw(c1415.04,861.58) R27.2@1388.43,834.96 ; 1377.4,898.19 cw(c1410.47,898.19) R28.1@1387.09,921.57 ; R28.1@1377.4,930 R27.2 1377.4,767.4
PGND1: D8.1 D9.1 R9.1 R10.1 R23.2 T5.3 T6.3 | length 1943
  Top Layer w40: T5.3@193.94,867.83 cw(c249.7,867.83) 210.27,907.27 ; T5.3 195.24,892.23 239.5,936.5 ; R9.1@250,940 246.5,936.5 239.5,936.5 ; R9.1@266.31,939.63 ccw(c254.88,921.12) 239.5,936.5
  Top Layer w50: T5.3@196.28,812.41 cw(c179.9,909.9) 110,840 190.08,759.92 410.03,759.92 D9.1@605,954.89 ; D9.1@585.81,935.69 cw(c630,891.5) D9.1@630,954
  Top Layer w80: 135,840 170,840
  Top Layer w90: 135,840 135,1195 ; 135,949.76 ccw(c277.17,949.76) T5.3@176.64,849.24 ; R23.2@121.13,1234.79 cw(c87.63,1201.29) 135,1201.29 ccw(c87.63,1201.29) R23.2@121.13,1234.79
  Bottom Layer w40: R10.1 355,1055 ; T6.3 374.76,1035.24 ; T6.3@375.73,996.96 ccw(c355.12,1015.59) 374.76,1035.24 ; T6.3@376.06,997.73 ccw(c303.59,1003.59) 355,1055 ; 355,1055 374.76,1035.24
  Bottom Layer w90: 410,973.23 D8.1@583.23,973.23
  other v1: 630,945 665,945 630,980 665,980 630,1015 665,1015
PGND2: D2.1 D3.1 R19.1 R20.1 R24.2 T1.3 T2.3 | length 2713.5
  Top Layer w30: 2480.24,1012.29 cw(c2511.5,1012.29) 2489.39,1034.39 cw(c2515,1008.79) 2515,1045 R20.1
  Top Layer w70: R24.2@2270,2050 2400,2050 ; 2341.54,2050 ccw(c2341.54,2128.46) v2@2397.02,2072.98 ; 2377.76,2050 cw(c2377.76,2022.76) v2@2397.02,2042.02
  Bottom Layer w40: R19.1@2595,925 2617,925 2659.76,882.23 T1.3 ; 2648.26,893.73 cw(c2617.37,862.83) T1.3@2661.06,862.83
  Bottom Layer w50: D3.1 2334.45,895.55 2334.45,840.55 2420.08,754.92 2515.51,754.92 2515.58,755 2610,755 2659.76,804.76 T1.3 ; v1@2225,989 cw(c2225,950.37) 2252.31,977.69 ccw(c2225,950.37) v1@2225,989
  Bottom Layer w80: 2450,2050 2490,2010 2750,1750 ; 2688.23,838.23 2750,900 ; 2423,2085 ccw(c2442.31,2085) 2428.66,2071.34 cw(c2442.31,2085) 2423,2085 ; 2490,2034.83 cw(c2505.17,2034.83) 2494.44,2045.56 ccw(c2505.17,2034.83) 2490,2034.83
  Bottom Layer w90: 2750,900 2750,1750
  Bottom Layer w100: D3.1@2230,970 D3.1 2435,970
  other v1: 2190,945 2225,945 2440,945 2190,980 2225,980 2440,995 2190,1015 2225,1015
  other v2: 2385,2030 2445,2030 2510,2030 2385,2085 2445,2085 2510,2085 2385,2145 2445,2145 2510,2145
PWM1: U2.18 U4.3 | length 901.7
  Top Layer w15: U4.3 v4(620,1655)
  Bottom Layer w15: v4@630,1655 905,1655 1240,1320 U2.18
PWM2: U2.16 U4.4 | length 1145.3
  Top Layer w15: U4.4 570,1680 600,1710 940,1710 1290,1360 v4(1340,1360)
  Bottom Layer w15: U2.16 v4(1340,1360)
PWM3: U2.14 U3.4 | length 1092.2
  Bottom Layer w15: U2.14 1440,1340 1805,1705 2125,1705 2205,1625 U3.4
PWM4: U2.12 U3.3 | length 938.5
  Bottom Layer w15: U2.12 1540,1385.96 1829.04,1675 2095,1675 2155,1615 U3.3
pads on no net: P3.6 U2.3 U2.5 U2.7 U2.9 U2.13 U2.15 U2.17 U2.19
copper on no net: | length 286.6
  Bottom Layer w120: -2993.43,325 -2993.43,611.57

## Polygon pours and split planes (outlines as drawn)
AGND on Top Layer "AGND" (hatched 45Degree grid 20 track 8, remove dead copper, pour order 2): 0,-196.85 -196.85,0 -196.85,2165.35 0,2362.2 2755.91,2362.2 2952.76,2165.35 2952.76,0 2755.91,-196.85
AGND on Bottom Layer "AGND" (hatched 45Degree grid 20 track 8, remove dead copper, pour order 4): -196.85,2165.35 0,2362.2 2755.91,2362.2 2952.76,2165.35 2952.76,0 2755.91,-196.85 5,-196.85 4.07,-196.85 -196.85,4.07

## Keep-outs
Keep-Out Layer:
  lines w10: -196.85,4.07 -196.85,2165.35 cw(c0,2165.35) 0,2362.2 2755.91,2362.2 cw(c2755.91,2165.35) 2952.76,2165.35 2952.76,0 cw(c2755.91,0) 2755.91,-196.85 5,-196.85 cw(c5,4.07) -195.92,4.07

## Other copper
Top Layer:
  rectangle net PGND1: 85,1145 180,1250
  region net PGND1: 190.15,759.89 220.07,759.97 219.93,810.05 190.01,809.97
  rectangle net PGND1: 130,870 180,955
  rectangle net GND: 2055,1975 2210,2115
  rectangle net PGND2: 2350,2005 2540,2180
  rectangle net GND: -100,1175 60,1260
  rectangle net PGND1: 85,1200 160,1250
  rectangle net 7.2V: 1925,450 2145,595
  rectangle net AGND: 1010,770 1205,1145
  rectangle net PGND1: 570,995 640,1035
  rectangle net PGND2: 2225,925 2295,955
  rectangle net PGND2: 2170,925 2230,1035
  rectangle net PGND2: 2425,920 2490,1020
  rectangle net PGND1: 175,940 250,955
  rectangle net PGND1: 175,900 215,940
  rectangle net PGND1: 590,925 685,1035
  rectangle net AGND: 1550,1085 1725,1205
  rectangle net GND: 2540,1330 2695,1530
  rectangle net GND: 0,1395 160,1465
  rectangle net PGND2: 2215,1025 2295,1035
Bottom Layer:
  rectangle net PGND2: 2350,2005 2540,2180
  rectangle net 7.2V: 715,450 935,590
  rectangle net AGND: 1010,770 1205,1145
  rectangle net PGND1: 570,925 640,960
  rectangle net PGND2: 2225,1005 2295,1035
  rectangle net PGND2: 2170,920 2230,1035
  rectangle net PGND1: 635,925 685,1035
  rectangle net AGND: 1615,1105 1710,1190
  rectangle net AGND: 1615,1085 1730,1190
  region net PGND2: 2600,940 2735,940 2735,925 2680,870

## Silkscreen, mask and mechanical layers (free items; w line width, h text height)
Top Overlay:
  text "+" at 1590,2145 h196.85
  text "PGND" at 2035,2135 h118.11
  text "+" at 1280,1720 h200 r180
  text "PGND" at -135,1065 h118.11
Top Solder:
  lines w30: 165,845 150,845 120,815 175,760 405,760 410,760 600,950 ; 1937.5,917.5 1970,885 2089.42,885 ; 2089.49,884.92 2183.98,884.92 2260,808.9
  lines w50: 132.62,824.99 ccw(c178.62,912.49) 195,815
  lines w120: 244.67,565.2 cw(c-63.28,257.25) 372.23,257.25 ; 372.23,237.6 372.23,617.6 ; 1636.57,1918.43 1636.57,1668.43 1765,1540 1832.52,1540 ; 1825,1532.48 1825,1450 1825,875 1984.65,715.35 ; 2570,265 2570,705.35
Bottom Solder:
  lines w30: 2260,970 2334.45,895.55 2334.45,840.55 2420.08,754.92 2515.51,754.92 2515.58,755 2610,755 2659.76,804.76 2659.76,838.23
  lines w40: 605,825 660,880
  lines w45: 660,880 885,880 914.76,909.76 914.76,968.23
  lines w120: 181.58,225.01 181.58,511.58 ; 196.57,526.57 300,630 ; 196.58,526.58 ccw(c55.81,667.35) 252.35,699.05 ; 2370,261.57 2370,330 2570,530 ; 2371.57,260 cw(c2544.37,260) 2422.18,382.18 ; 2465.16,425.16 ccw(c2328.6,561.73) 2521.73,561.73
  lines w130: 835,630 1920,630

## Text inside footprints (layer, text, board x,y; h text height)
P1: Top Overlay "V" at 201.26,343.11 h50 r180; Top Overlay "V" at 398.11,343.11 h50 r180
P2: Top Overlay "V" at 2391.26,373.11 h50 r180; Top Overlay "V" at 2588.11,373.11 h50 r180
P4: Top Overlay "V" at 1656.26,2043.11 h50 r180; Top Overlay "V" at 1853.11,2043.11 h50 r180